# Altium PCB binbot_board.PcbDoc
Units mm, origin at the board's own origin, x right, y up, seen from the top; angles counter-clockwise.
Board outline 120.96 x 80.83 mm, 2 copper layers (Top Layer, Bottom Layer); 27 components, 0 nets, 127 pads, 42 vias.
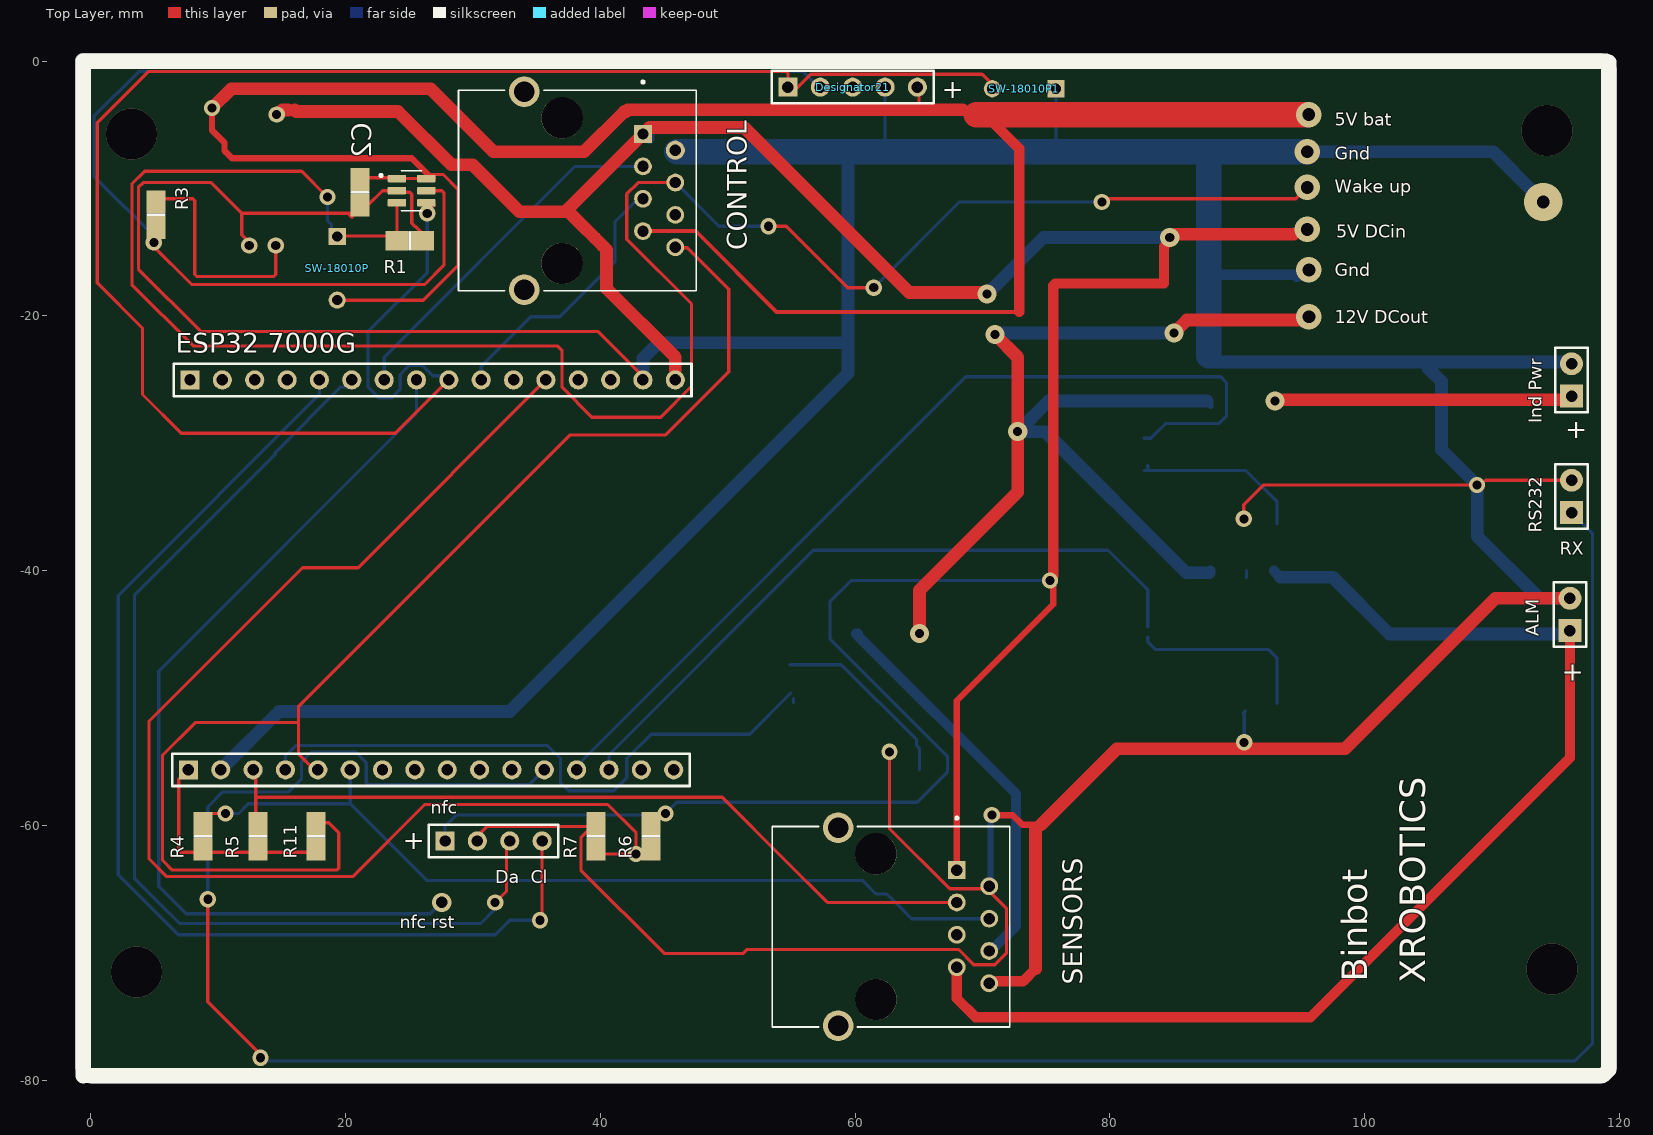
[diagram p0: Top Layer view]
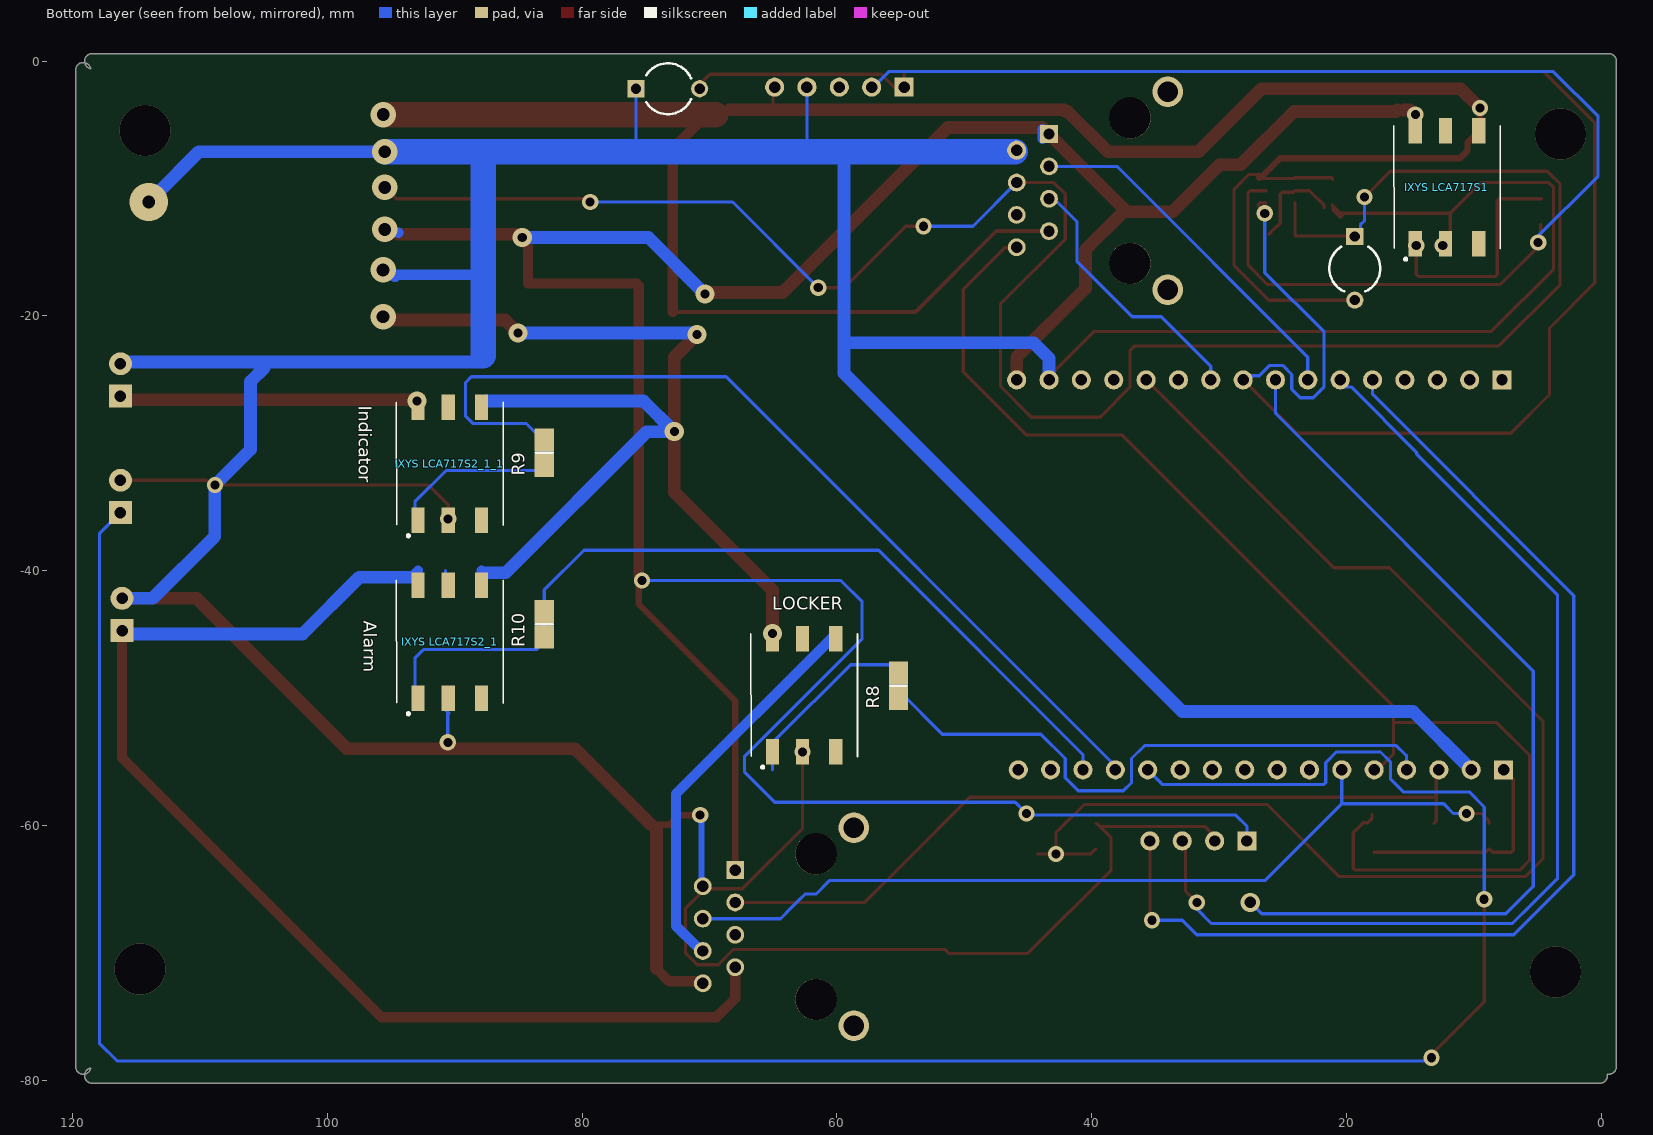
[diagram p1: Bottom Layer view, seen from below]

## Layer stack, top to bottom
Top Solder: solder mask 0.0102, Solder Resist, Dk 3.5
Top Layer: signal copper 0.0356
Dielectric 1: dielectric 0.32, FR-4, Dk 4.8
Bottom Layer: signal copper 0.0356
Bottom Solder: solder mask 0.0102, Solder Resist, Dk 3.5

## Board outline
-0.475,-79.516 cw(c-0.589,-78.926) -1.189,-78.926 -1.189,0 cw(c-0.589,0) -0.589,0.6 118.469,0.6 cw(c118.469,0) 119.07,0 119.059,-0.113 cw(c118.469,0) 118.583,-0.59 cw(c119.172,-0.703) 119.059,-0.113 cw(c119.172,-0.703) 119.773,-0.703 119.773,-78.926 cw(c119.172,-78.926) 119.059,-79.516 cw(c119.172,-78.926) 118.583,-79.039 cw(c118.469,-79.629) 119.059,-79.516 119.07,-79.629 cw(c118.469,-79.629) 118.469,-80.229 0.114,-80.229 cw(c0.114,-79.629)

## Design rules (kind name [scope] priority, off if disabled: settings)
Clearance [All] p1: gap=0.254 ignorepadtopadclearanceinfootprint=FALSE except(0: Arc-Hole Track-Hole SMDPad-Hole THPad-Hole Via-Hole Fill-Hole Poly-Hole Region-Hole Text-Hole)
PolygonConnect [All] p1: connectstyle=Relief reliefconductorwidth=0.254 reliefentries=4 polygonreliefangle="90 Angle" airgapwidth=0.254
RoutingVias [All] p1: holewidth=0.711 width=1.27 viastyle="Through Hole" minholewidth=0.711 minwidth=1.27 maxholewidth=0.711 maxwidth=1.27
SolderMaskExpansion [All] p1: expansion=0.102 istentingtop=FALSE
Width [All] p1: maxlimit=0.254 minlimit=0.254 preferedwidth=0.254
30 further rules are at their usual default settings.

## Components (designator, comment, footprint, x,y, rotation, side; value= is the part's Value field where it differs from the comment)
ALM "Comment" HDR1X2 116.251,-26.289 r90 top
C2 "0.1μf" 6-0805_M 21.128,-10.287 r90 top
CONTROL "UTP Connector" CUI_CRJ056-1-TH#1 37.003,-10.16 r270 top
Designator21 "Comment" HDR1X5 54.737,-2.032 r0 top
"ESP32 7000G" "ESP32 7000G" HDR1X16 7.793,-25.019 r0 top
"Ind Pwr" "Comment" HDR1X2 116.124,-44.704 r90 top
"IXYS LCA717S1" "IXYS LCA717S" *SON160P500X500X140-6N 12.111,-9.897 r90 bottom
"IXYS LCA717S2_1" "IXYS LCA717S" *SON160P500X500X140-6N 90.394,-45.584 r90 bottom
"IXYS LCA717S2_1_1" "IXYS LCA717S" *SON160P500X500X140-6N 90.394,-31.614 r90 bottom
LOCKER "IXYS LCA717S" *SON160P500X500X140-6N 62.581,-49.775 r90 bottom
nfc "Comment" HDR1X4 27.813,-61.214 r0 top
R1 "180K Ohms" 6-0805_M 25.043,-14.097 r0 top (schematic designator R3)
R3 "0.5K Ohms" 6-0805_M 5.126,-12.065 r90 top (schematic designator R2)
R4 "4.7K Ohms" 6-0805_M 8.809,-60.833 r90 top (schematic designator R3)
R5 "4.7K Ohms" 6-0805_M 13.127,-60.833 r90 top (schematic designator R3)
R6 "0.5K Ohms" 6-0805_M 43.988,-60.833 r90 top (schematic designator R3)
R7 "1K Ohms" 6-0805_M 39.67,-60.833 r90 top (schematic designator R3)
R8 "0.5K Ohms" 6-0805_M 55.164,-49.038 r90 bottom (schematic designator R3)
R9 "0.5K Ohms" 6-0805_M 82.977,-30.75 r90 bottom (schematic designator R3)
R10 "0.5K Ohms" 6-0805_M 82.977,-44.212 r90 bottom (schematic designator R3)
R11 "4.7K Ohms" 6-0805_M 17.699,-60.833 r90 top (schematic designator R3)
RS232 "Comment" HDR1X2 116.251,-35.433 r90 top
SENSORS "UTP Connector" CUI_CRJ056-1-TH#2 61.641,-67.945 r270 top
SW-18010P "SW-18010P" CAPR5-4X5 19.35,-16.256 r270 top
SW-18010P1 "SW-18010P" CAPR5-4X5 73.279,-2.159 r180 top
? "TPL5110" SOT95P280X110-6N 25.192,-10.16 r0 top
? "Comment" HDR1X16 7.666,-55.626 r0 top

## Footprints (in the part's own frame and the unit in brackets; to place one, negate y for a bottom-side part, rotate by r counter-clockwise, add the part's x,y. Pads: shape width x height; smd on the part's side, far side on the other; paste and mask are expansions set on the pad)
6-0805_M [mm] "Ceramic Capacitor SMD/SMT 25volts 0.1uF"
  rect 1.8x1.5 smd: 1(-1,0) 2(1,0)
  silkscreen extent 0,-0.65 0,0.65, body extent -1.07,-0.7 1.07,0.7, height 0.7
*SON160P500X500X140-6N [mm]
  rect 2x1.03 smd: 1(-4.436,2.489) 2(-4.436,0.127) 3(-4.436,-2.489) 4(4.436,-2.489) 5(4.436,0.127) 6(4.436,2.489)
  silkscreen extent -5.74,-4.19 4.83,4.19
CAPR5-4X5 [mm] "Capacitor; 2 Leads"
  rect 1.35x1.35 hole 0.8: 1(-2.5,0)
  round 1.35 hole 0.8: 2(2.5,0)
CUI_CRJ056-1-TH#1 [mm]
  rect 1.398x1.398 / inner round 1.398 / far side rect 1.398x1.398 hole 0.89: 1(-4.445,6.35)
  round 1.5 hole 0.89: 2(-3.175,8.89)
  round 1.398 hole 0.89: 3(-1.905,6.35) 4(-0.635,8.89) 5(0.635,6.35) 6(1.905,8.89) 7(3.175,6.35) 8(4.445,8.89)
  round 2.4 hole 1.6: S1(-7.77,-2.97) S2(7.77,-2.97)
  round 3.25 hole 3.25 unplated: ""(-5.715,0) ""(5.715,0)
  silkscreen extent -8.62,-8.13 7.87,10.52, body extent -7.87,-8.13 7.87,10.52, height 11.75
CUI_CRJ056-1-TH#2 [mm]
  rect 1.398x1.398 / inner round 1.398 / far side rect 1.398x1.398 hole 0.89: 1(-4.445,6.35)
  round 1.398 hole 0.89: 2(-3.175,8.89) 3(-1.905,6.35) 4(-0.635,8.89) 5(0.635,6.35) 6(1.905,8.89) 7(3.175,6.35) 8(4.445,8.89)
  round 2.4 hole 1.6: S1(-7.77,-2.97) S2(7.77,-2.97)
  round 3.25 hole 3.25 unplated: ""(-5.715,0) ""(5.715,0)
  silkscreen extent -8.62,-8.13 7.87,10.52, body extent -7.87,-8.13 7.87,10.52, height 11.75
HDR1X2 [mm] "Connector; Header; 2 Position"
  rect 1.8x1.8 hole 0.9: 1(0,0)
  round 1.8 hole 0.9: 2(2.54,0)
  silkscreen extent -1.27,-1.27 3.81,1.27
HDR1X4 [mm] "Connector; Header; 4 Position"
  rect 1.5x1.5 hole 0.9: 1(0,0)
  round 1.5 hole 0.9: 2(2.54,0) 3(5.08,0) 4(7.62,0)
  silkscreen extent -1.27,-1.27 8.89,1.27
HDR1X5 [mm] "Connector; Header; 5 Position"
  rect 1.5x1.5 hole 0.9: 1(0,0)
  round 1.5 hole 0.9: 2(2.54,0) 3(5.08,0) 4(7.62,0) 5(10.16,0)
  silkscreen extent -1.27,-1.27 11.43,1.27
HDR1X16 [mm] "Connector; Header; 16 Position"
  rect 1.5x1.5 hole 0.9: 1(0,0)
  round 1.5 hole 0.9: 2(2.54,0) 3(5.08,0) 4(7.62,0) 5(10.16,0) 6(12.7,0) 7(15.24,0) 8(17.78,0) 9(20.32,0) 10(22.86,0) 11(25.4,0) 12(27.94,0) 13(30.48,0) 14(33.02,0) 15(35.56,0) 16(38.1,0)
  silkscreen extent -1.27,-1.27 39.37,1.27
SOT95P280X110-6N [mm]
  rrect25% 1.45x0.59 smd: 1(-1.155,0.95) 2(-1.155,0) 3(-1.155,-0.95) 4(1.155,-0.95) 5(1.155,0) 6(1.155,0.95)
  silkscreen extent -2.5,-1.57 0.8,1.57

## Part data
SW-18010P SW-18010P1: library part Cap2

## Via types
v1: diameter 1.27, hole 0.711, Top Layer to Bottom Layer, 23 vias
v2: diameter 1.5, hole 0.711, Top Layer to Bottom Layer, 7 vias
v3: diameter 2, hole 1, Top Layer to Bottom Layer, 6 vias
v4: diameter 4, hole 4, Top Layer to Bottom Layer, 4 vias
v5: diameter 1.5, hole 0.9, Top Layer to Bottom Layer, 1 vias
v6: diameter 3, hole 1, Top Layer to Bottom Layer, 1 vias

## Nets (pads, with @x,y where several pads share a name; then routed paths per layer and width w, separated by ;. In a path a pad name is that pad's centre, name@x,y a point inside that pad or via, vN(x,y) a via of type N, cw(c..) or ccw(c..) an arc to the next point about the centre after c; other vN are vias at no path point)
pads on no net: "ESP32 7000G.1" "ESP32 7000G.2" "ESP32 7000G.3" "ESP32 7000G.4" "ESP32 7000G.5" "ESP32 7000G.6" "ESP32 7000G.7" "ESP32 7000G.8" "ESP32 7000G.9" "ESP32 7000G.10" "ESP32 7000G.11" "ESP32 7000G.12" "ESP32 7000G.13" "ESP32 7000G.14" "ESP32 7000G.15" "ESP32 7000G.16" "Ind Pwr.1" "Ind Pwr.2" "IXYS LCA717S1.1" "IXYS LCA717S1.2" "IXYS LCA717S1.3" "IXYS LCA717S1.4" "IXYS LCA717S1.5" "IXYS LCA717S1.6" "IXYS LCA717S2_1.1" "IXYS LCA717S2_1.2" "IXYS LCA717S2_1.3" "IXYS LCA717S2_1.4" "IXYS LCA717S2_1.5" "IXYS LCA717S2_1.6" "IXYS LCA717S2_1_1.1" "IXYS LCA717S2_1_1.2" "IXYS LCA717S2_1_1.3" "IXYS LCA717S2_1_1.4" "IXYS LCA717S2_1_1.5" "IXYS LCA717S2_1_1.6" ?.1 ?.2 ?.3 ?.4 ?.5 ?.6 ?.7 ?.8 ?.9 ?.10 ?.11 ?.12 ?.13 ?.14 ?.15 ?.16 ALM.1 ALM.2 C2.1 C2.2 CONTROL. CONTROL.1 CONTROL.2 CONTROL.3 CONTROL.4 CONTROL.5 CONTROL.6 CONTROL.7 CONTROL.8 CONTROL.S1 CONTROL.S2 Designator21.1 Designator21.2 Designator21.3 Designator21.4 Designator21.5 LOCKER.1 LOCKER.2 LOCKER.3 LOCKER.4 LOCKER.5 LOCKER.6 nfc.1 nfc.2 nfc.3 nfc.4 R1.1 R1.2 R3.1 R3.2 R4.1 R4.2 R5.1 R5.2 R6.1 R6.2 R7.1 R7.2 R8.1 R8.2 R9.1 R9.2 R10.1 R10.2 R11.1 R11.2 RS232.1 RS232.2 SENSORS. SENSORS.1 SENSORS.2 SENSORS.3 SENSORS.4 SENSORS.5 SENSORS.6 SENSORS.7 SENSORS.8 SENSORS.S1 SENSORS.S2 SW-18010P1.1 SW-18010P1.2 SW-18010P.1 SW-18010P.2
copper on no net: | length 2696.9
  Top Layer w0.254: 4.711,-10.795 8.025,-10.795 8.174,-10.944 8.174,-16.742 8.323,-16.891 14.375,-16.891 14.524,-16.742 v1(14.524,-14.478) ; 4.745,-12.827 4.745,-14.351 7.92,-17.526 26.208,-17.526 27.724,-16.011 27.724,-10.309 27.575,-10.16 26.347,-10.16 ; 7.666,-55.626 6.916,-56.376 6.916,-56.884 6.916,-61.954 7.065,-62.103 8.539,-62.103 8.809,-61.833 9.079,-62.103 13.127,-62.103 17.849,-62.103 ; 8.809,-59.833 8.809,-59.678 9.432,-59.055 v1@10.333,-59.055 ; v1(9.19,-65.786) 9.19,-73.833 v1@13.462,-78.105 ; v1(12.446,-14.478) 12.446,-14.219 11.857,-13.63 11.857,-11.938 ; 12.746,-55.626 12.954,-55.834 12.954,-57.785 12.954,-59.66 13.127,-59.833 ; 13.072,-57.785 49.576,-57.785 54.656,-62.865 57.831,-66.04 67.991,-66.04 ; 15.667,-55.626 15.667,-55.507 ; 17.789,-55.843 16.302,-54.356 16.302,-51.92 ; 17.953,-25.227 17.953,-25.019 ; 18.005,-59.107 18.005,-59.466 18.322,-59.783 18.681,-59.783 19.477,-60.579 19.477,-63.351 19.328,-63.5 6.396,-63.5 5.634,-62.738 5.634,-54.483 8.197,-51.92 16.302,-51.92 ; v1(18.588,-10.668) 16.556,-8.636 4.237,-8.636 3.233,-9.64 3.233,-17.538 8.047,-22.352 36.622,-22.352 37.003,-22.733 37.003,-25.602 39.341,-27.94 44.75,-27.94 47.163,-25.527 47.163,-19.05 42.083,-13.97 42.083,-10.414 42.972,-9.525 46.365,-9.525 ; 18.969,-13.716 23.938,-13.716 ; 19.35,-18.756 26.113,-18.756 28.829,-16.04 28.829,-10.033 27.686,-8.89 26.667,-8.89 26.628,-8.929 26.576,-8.982 26.347,-9.21 ; 20.326,-12.09 20.505,-12.269 21.057,-11.718 21.057,-11.359 ; 21.128,-11.287 21.128,-11.315 20.505,-11.938 11.857,-11.938 ; 21.128,-9.287 21.128,-9.157 21.141,-9.144 24.067,-9.144 ; 21.763,-11.52 21.763,-11.303 22.906,-10.16 24.037,-10.16 24.166,-10.288 25.043,-10.288 25.192,-10.437 25.192,-12.716 25.442,-12.966 25.492,-12.966 26.065,-13.539 26.065,-13.589 ; 24.037,-13.716 24.037,-11.11 ; 24.037,-9.21 26.347,-9.21 ; 26.347,-11.11 26.777,-11.11 26.945,-11.278 26.945,-11.352 ; v1(26.416,-11.938) v1@26.576,-11.938 ; 26.611,-9.21 26.347,-9.21 ; 28.113,-25.019 23.922,-29.21 7.112,-29.21 4.064,-26.162 4.064,-20.955 0.508,-17.399 0.508,-4.826 4.525,-0.809 54.588,-0.809 54.737,-0.958 54.737,-2.159 55.372,-2.159 56.515,-1.016 69.215,-1.016 69.977,-1.016 71.12,-2.159 ; 30.099,-61.087 31.1,-60.086 39.367,-60.086 ; v1(31.75,-66.04) 32.639,-65.151 32.639,-61.214 ; 34.033,-17.99 34.033,-17.93 ; v1(35.268,-67.437) 35.433,-67.272 35.433,-61.214 ; 35.733,-25.019 20.987,-39.765 16.623,-39.765 4.572,-51.816 4.572,-62.611 5.969,-64.008 20.554,-64.008 26.21,-58.352 40.578,-58.352 42.81,-60.584 v1@42.81,-62.355 ; 37.511,-11.811 37.511,-11.557 ; 39.67,-61.833 40.067,-62.23 v1(42.81,-62.23) 44.242,-62.23 ; 39.67,-59.833 39.62,-59.833 38.481,-60.972 38.481,-63.5 45.021,-70.04 51.226,-70.04 51.543,-69.723 62.384,-69.723 68.122,-69.723 69.329,-70.93 70.979,-70.93 71.882,-70.027 71.882,-66.502 70.341,-64.961 ; 40.321,-24.781 40.492,-24.781 41.067,-25.356 41.067,-25.527 ; 43.48,-24.892 39.797,-21.209 8.636,-21.209 3.741,-16.314 3.741,-9.894 4.11,-9.525 5.746,-9.525 7.703,-9.525 9.444,-9.525 11.857,-11.938 ; 45.893,-14.605 45.935,-14.647 46.824,-14.647 47.1,-14.923 50.084,-17.907 50.084,-24.384 45.131,-29.337 37.638,-29.337 16.302,-50.673 16.302,-51.92 ; v1(53.213,-12.954) 54.61,-12.954 59.436,-17.78 v1(61.468,-17.78) ; 58.671,-75.715 59.351,-75.715 ; v1(62.708,-54.211) 62.708,-60.249 67.42,-64.961 70.341,-64.961 ; 65.024,-4.064 65.024,-3.683 65.024,-2.032 ; 70.531,-64.77 70.341,-64.961 ; 75.565,-17.609 75.714,-17.46 ; v1@79.121,-11.303 79.629,-10.795 94.604,-10.795 v3(95.493,-9.906) ; 84.267,-17.46 84.328,-17.399 ; 84.328,-14.499 84.709,-14.118 v2(84.709,-13.843) ; v1(90.521,-35.923) 90.521,-34.798 90.539,-34.78 91.537,-33.782 92.045,-33.274 v1(108.839,-33.274) 109.114,-33.274 109.495,-32.893 116.251,-32.893 117.024,-32.893 ; v1@90.551,-53.975 v1(90.551,-53.467) ; v3@95.377,-20.32 v3(95.631,-20.066)
  Top Layer w0.3: 43.353,-13.335 47.498,-13.335 53.848,-19.685 72.898,-19.685
  Top Layer w0.5: v1(9.525,-3.683) 9.525,-5.415 10.506,-6.397 10.506,-7.031 11.095,-7.62 25.214,-7.62 26.611,-9.017 ; 26.716,-9.017 26.843,-9.144 ; 67.991,-63.5 67.991,-50.191 75.565,-42.617 v1@75.565,-40.767 ; 70.531,-72.39 70.703,-72.218 71.148,-72.218 ; v1(70.739,-59.182) 72.39,-59.182 73.152,-59.944 74.595,-59.944 ; 115.87,-26.67 116.251,-26.289
  Top Layer w0.8: 15.515,-3.836 16.016,-3.836 ; 67.991,-71.12 67.991,-73.579 69.469,-75.057 95.758,-75.057 116.124,-54.691 116.124,-44.704 ; v2@70.231,-18.161 v2(70.358,-18.288) ; 70.231,-4.191 72.898,-6.858 72.898,-19.685 ; 71.148,-72.218 73.197,-72.218 74.168,-71.247 ; 74.168,-60.371 74.595,-59.944 ; v1(75.311,-40.767) 75.311,-40.64 75.565,-40.386 75.565,-17.609 ; 75.714,-17.46 84.267,-17.46 84.267,-14.56 84.328,-14.499 ; v2(84.709,-13.843) 84.836,-13.843 v2@85.09,-13.589 ; v2(92.964,-26.67) v2@93.054,-26.58 ; 94.424,-13.589 94.575,-13.438 94.96,-13.438 95.112,-13.589 v3(95.493,-13.208) ; 115.78,-26.58 115.87,-26.67
  Top Layer w1: v1(9.525,-3.683) 11.049,-2.159 26.67,-2.159 31.623,-7.112 38.735,-7.112 41.91,-3.937 42.037,-3.937 42.164,-3.81 65.024,-3.81 ; v1@14.652,-4.139 14.725,-4.139 15.029,-3.836 15.515,-3.836 ; 16.016,-3.836 16.117,-3.937 18.545,-3.937 20.998,-3.937 24.13,-3.937 28.321,-8.128 29.972,-8.128 33.655,-11.811 37.511,-11.811 38.471,-12.771 39.58,-13.88 ; 37.511,-11.557 43.353,-5.715 43.861,-5.207 51.308,-5.207 64.262,-18.161 v2@70.231,-18.161 ; 40.177,-14.477 39.58,-13.88 ; 45.893,-25.019 45.893,-23.241 40.492,-17.839 40.492,-14.791 39.58,-13.88 ; v2(65.07,-44.939) 65.07,-41.529 72.771,-33.828 v2(72.771,-29.083) 72.771,-23.241 v2(70.993,-21.463) ; 65.151,-3.81 68.461,-3.81 ; 74.168,-71.247 74.168,-60.371 ; 74.595,-59.944 80.564,-53.975 v1@90.749,-53.975 ; v2@84.963,-21.336 v2(85.033,-21.336) 86.049,-20.32 95.106,-20.32 95.169,-20.257 95.314,-20.257 v3@95.377,-20.32 ; v2@85.09,-13.589 94.424,-13.589 ; v1@90.551,-53.975 98.471,-53.975 110.282,-42.164 116.124,-42.164 ; v2@93.054,-26.58 115.78,-26.58
  Top Layer w2: 69.515,-4.191 v3@95.377,-4.191
  Bottom Layer w0.254: v1@5.262,-14.025 0.254,-9.017 0.254,-4.318 3.763,-0.809 55.927,-0.809 57.277,-2.159 ; v1(9.19,-65.786) 9.19,-58.547 10.373,-57.364 15.528,-57.364 16.556,-56.336 16.556,-55.003 17.33,-54.229 20.801,-54.229 21.636,-55.064 21.636,-56.626 21.785,-56.775 34.458,-56.775 35.606,-55.626 ; v1(10.587,-59.055) 11.603,-59.055 12.365,-58.293 20.382,-58.293 ; v1@13.254,-78.486 116.505,-78.486 117.902,-77.089 117.902,-37.084 116.251,-35.433 ; 15.286,-55.626 15.286,-54.527 15.445,-54.368 16.092,-53.721 35.86,-53.721 36.876,-54.737 36.876,-56.642 37.511,-57.277 41.067,-57.277 42.083,-56.261 42.083,-54.737 43.988,-52.832 51.735,-52.832 54.974,-49.594 ; 17.826,-24.892 18.207,-24.511 ; 17.953,-25.019 17.953,-26.159 2.159,-41.954 2.159,-63.881 6.858,-68.58 31.75,-68.58 32.893,-67.437 v1@35.687,-67.437 ; 18.207,-55.626 18.398,-55.816 ; v1(18.588,-10.668) 18.588,-12.354 18.588,-12.533 18.628,-12.573 18.906,-12.851 18.906,-13.653 18.969,-13.716 ; 20.366,-55.626 20.382,-55.642 20.382,-58.293 ; 20.493,-25.572 19.64,-25.572 14.478,-30.734 14.478,-30.861 3.429,-41.91 3.429,-64.135 5.461,-66.167 6.985,-67.691 30.607,-67.691 31.75,-66.548 v1@31.75,-66.294 ; 20.493,-25.145 20.493,-25.019 ; 23.033,-25.019 23.033,-23.241 38.019,-8.255 43.861,-8.255 ; 25.573,-25.019 25.573,-27.64 5.334,-47.879 5.334,-64.77 6.985,-66.421 7.493,-66.929 26.669,-66.929 v5@27.558,-66.04 ; v1(26.416,-11.938) 26.416,-16.593 21.762,-21.248 21.762,-25.572 22.606,-26.416 23.622,-26.416 24.303,-25.735 24.303,-24.592 25.019,-23.876 26.03,-23.876 26.843,-24.69 28.643,-24.69 ; 27.813,-61.214 27.813,-60.071 28.702,-59.182 45.004,-59.182 v1(45.131,-59.055) 46.02,-58.166 64.897,-58.166 67.257,-55.806 67.257,-54.557 58.03,-45.33 58.03,-42.427 59.69,-40.767 v1(75.311,-40.767) ; 30.653,-25.019 30.653,-23.957 34.544,-20.066 36.83,-20.066 41.148,-15.748 41.148,-12.619 43.353,-10.414 ; 38.146,-55.626 38.146,-55.326 68.707,-24.765 88.696,-24.765 89.154,-25.223 89.154,-27.863 88.569,-28.448 84.374,-28.448 83.231,-29.591 82.677,-29.591 ; 40.686,-55.626 40.686,-54.437 56.737,-38.386 79.858,-38.386 82.977,-41.505 82.977,-43.012 82.977,-44.39 ; v1(42.81,-62.23) v1@42.81,-61.989 ; 43.226,-55.626 43.371,-55.77 ; 45.826,-14.538 45.893,-14.605 ; 45.958,-9.509 45.958,-9.59 49.322,-12.954 v1(53.213,-12.954) ; 46.292,-12.262 46.292,-11.955 ; 54.91,-47.371 58.928,-47.371 64.831,-53.274 64.831,-53.718 65.07,-53.957 65.07,-55.626 ; 55.164,-50.388 55.164,-50.038 ; 59.817,-2.159 60.108,-2.159 ; v1(61.468,-17.78) 61.662,-17.586 68.199,-11.049 v1(79.375,-11.049) ; 62.119,-1.921 62.357,-2.159 62.357,-7.112 ; 70.15,-67.31 64.435,-67.31 63.673,-66.548 63.038,-65.913 62.499,-65.373 61.641,-65.373 60.594,-64.326 26.415,-64.326 20.382,-58.293 ; 75.779,-2.159 75.779,-6.183 76.2,-6.604 ; 82.677,-32.131 90.678,-32.131 93.137,-34.59 93.137,-36.322 ; 82.977,-45.212 82.977,-45.562 83.6,-46.185 92.459,-46.185 92.502,-46.228 93.137,-46.863 93.137,-50.419 ; 82.977,-32.1 82.977,-31.75 ; v1(90.551,-53.467) 90.551,-51.252 90.48,-51.181 90.629,-51.032 ; 90.724,-40.513 90.724,-40.005 ; 100.838,-23.947 100.838,-23.619 ; v6@113.157,-10.795 113.781,-10.795 v6(114.035,-11.049) ; 116.251,-23.749 116.257,-23.749 116.759,-23.247
  Bottom Layer w0.5: 70.531,-64.77 70.635,-64.666 70.635,-59.286 v1(70.739,-59.182) ; 87.64,-26.67 87.905,-26.935 87.905,-27.051
  Bottom Layer w0.8: 43.861,-6.096 43.861,-5.334 ; 60.092,-44.939 60.207,-44.939 60.207,-45.094 72.644,-57.531 72.644,-67.864 70.912,-69.596 ; v2(70.993,-21.463) v2@71.12,-21.336 ; 87.79,-40.148 87.79,-40.12 87.905,-40.005 ; 88.011,-16.764 94.869,-16.764 94.685,-16.948 94.741,-16.948 95.306,-16.383 v3(95.631,-16.383) ; 92.883,-40.005 93.391,-40.513 ; 94.424,-13.462 94.448,-13.438 ; v3@95.263,-13.438 v3(95.493,-13.208)
  Bottom Layer w1: 10.206,-55.626 14.778,-51.054 32.893,-51.054 59.453,-24.494 59.453,-22.098 59.453,-7.112 ; 43.353,-25.019 43.353,-23.322 44.577,-22.098 59.182,-22.098 ; v2(70.358,-18.288) 74.803,-13.843 v2(84.709,-13.843) ; v2@71.12,-21.336 v2@84.963,-21.336 ; 87.64,-26.67 78.369,-26.67 75.184,-26.67 v2(72.771,-29.083) 74.93,-29.083 85.995,-40.148 87.79,-40.148 ; 88.014,-23.619 100.838,-23.619 115.882,-23.619 116.119,-23.856 116.119,-23.881 ; 93.391,-40.513 97.506,-40.513 101.951,-44.958 116.124,-44.958 ; v3(95.493,-7.112) 110.098,-7.112 113.469,-10.483 v6(114.035,-11.049) ; 104.965,-24.066 106.045,-25.146 106.045,-30.48 v1(108.839,-33.274) 108.839,-37.292 113.711,-42.164 116.505,-42.164
  Bottom Layer w2: 46.02,-7.112 59.453,-7.112 62.357,-7.112 75.75,-7.112 80.391,-7.112 87.757,-7.112 ; 87.757,-23.114 87.757,-18.161 ; 87.757,-18.288 87.757,-7.112 ; v3(95.493,-7.112) 87.757,-7.112
  other v1: 13.335,-78.232 4.953,-14.224 14.6,-4.191
  other v3: 95.62,-4.191
  other v4: 3.602,-71.501 114.727,-71.247 3.198,-5.703 114.323,-5.449
  other v5: 27.559,-66.04

## Silkscreen, mask and mechanical layers (free items; w line width, h text height)
Top Overlay:
  lines w1.2: -0.589,-79.647 -0.589,0 118.97,0 ; -0.468,-79.629 118.718,-79.629 119.172,-79.175 119.172,-0.057
  text "+" at 66.802,-2.921 h1.52
  text "5V bat" at 97.663,-5.08 h1
  text "Gnd" at 97.663,-7.747 h1
  text "Wake up" at 97.663,-10.335 h1
  text "5V DCin" at 97.79,-13.843 h1
  text "Gnd" at 97.663,-16.891 h1
  text "12V DCout" at 97.663,-20.574 h1
  text "+" at 115.743,-29.591 h1.52
  text "RX" at 115.316,-38.735 h1
  text "+" at 115.489,-48.641 h1.52
  text "+" at 24.511,-61.849 h1.52
  text "Da" at 31.75,-64.516 h1
  text "Cl" at 34.544,-64.516 h1
  text "nfc rst" at 24.257,-68.072 h1
  text "Binbot" at 100.203,-72.263 h2 r90
  text "XROBOTICS" at 104.775,-72.39 h2 r90
Bottom Overlay:
  text "Indicator" at 97.536,-27.051 h1 r90
  text "Alarm" at 97.155,-43.942 h1 r90